# EAGLE board hip4081-hbridge2 (EAGLE 5.06)
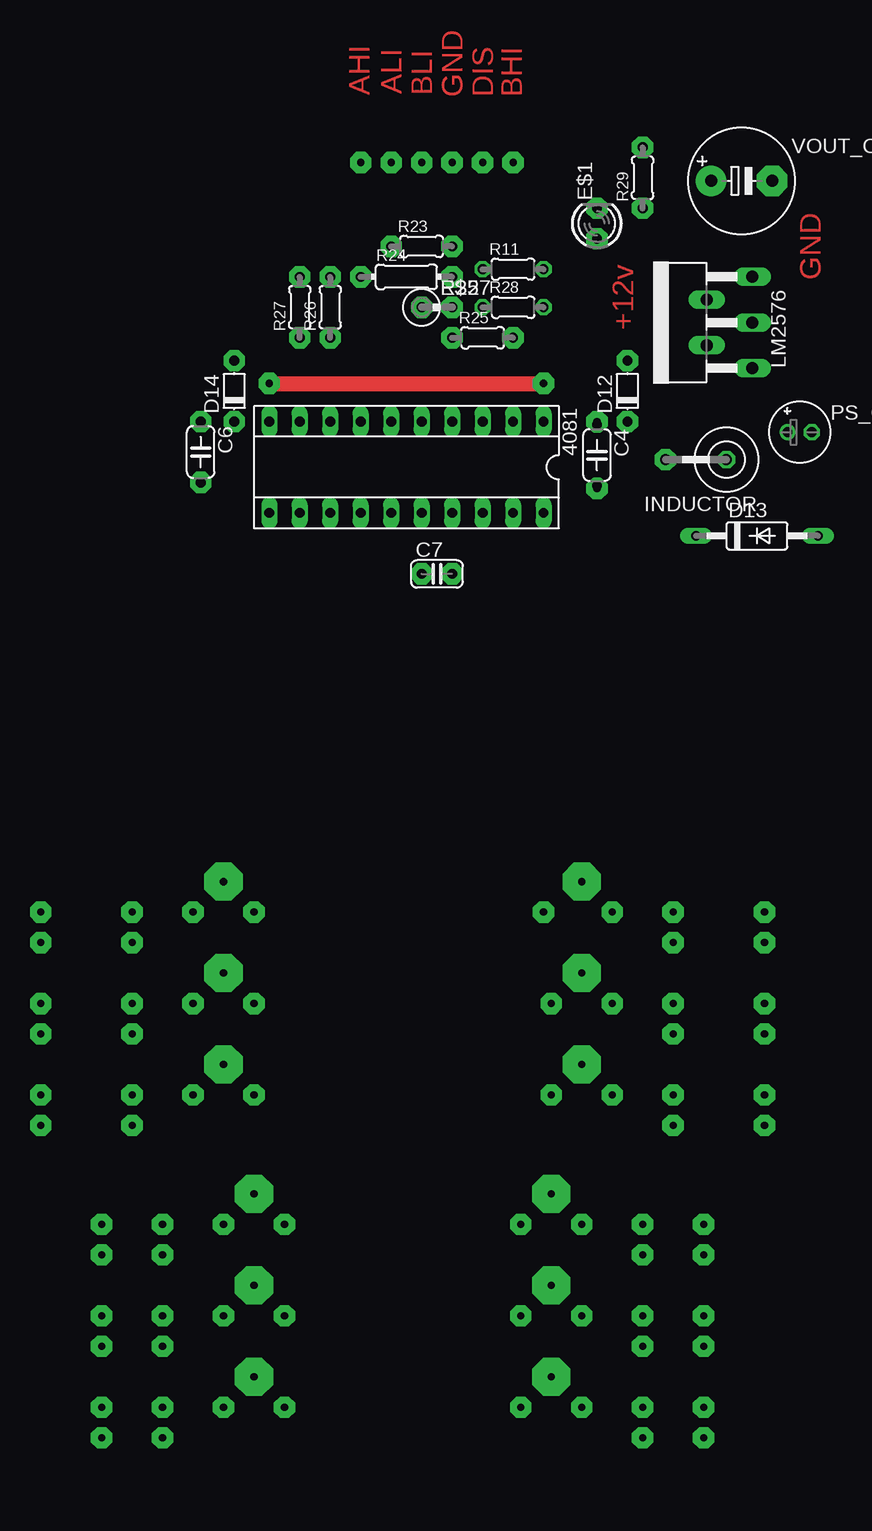
[diagram p0: board, top side]
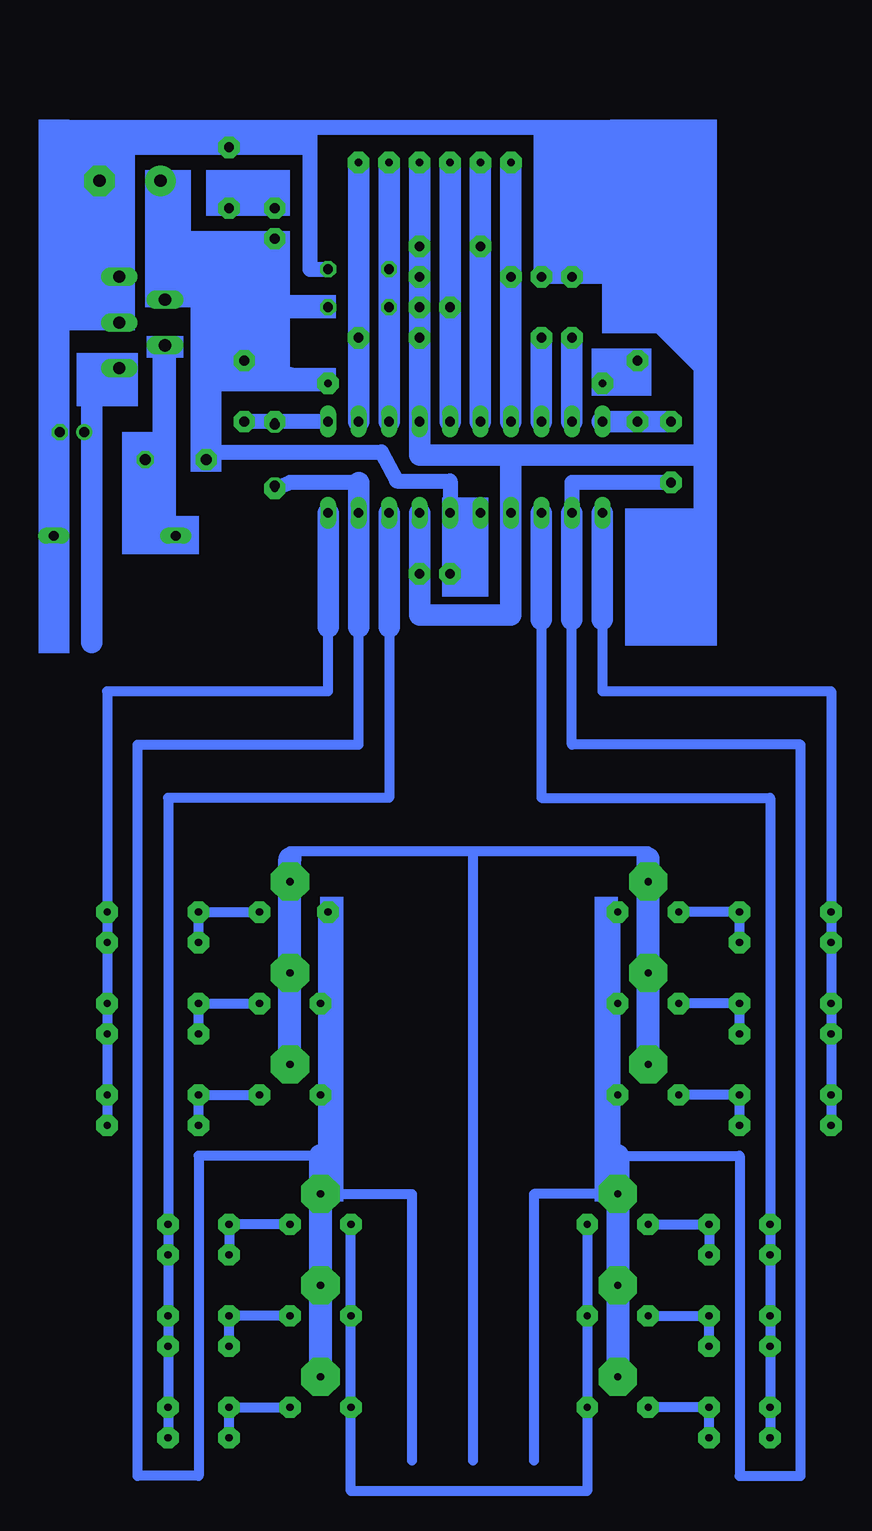
[diagram p1: board, bottom side, seen from below]

No outline drawn. Coordinates in mm, seen from the top.
Copper layers (1*16): Top 0.035mm / dielectric 1.5mm / Bottom 0.035mm
Design rules "default": minimum track width 10mil, minimum drill 24mil, track to track 8mil, track to pad 8mil, pad to pad 8mil, via to via 8mil, smd to smd 8mil, copper to edge 40mil, drill to drill 8mil, minimum pad ring 10mil, minimum via ring 8mil, stop-mask expansion 4mil, vias tented up to drill 0mil, thermal gap 10mil

## Footprints (pad centres in the part's own frame; a part is rotated, then mirrored left to right if it is on the bottom)
SOCKET-20 = drill 0.813 long: 1 -11.43,-3.81; 2 -8.89,-3.81; 3 -6.35,-3.81; 4 -3.81,-3.81; 5 -1.27,-3.81; 6 1.27,-3.81; 7 3.81,-3.81; 8 6.35,-3.81; 9 8.89,-3.81; 10 11.43,-3.81; 11 11.43,3.81; 12 8.89,3.81; 13 6.35,3.81; 14 3.81,3.81; 15 1.27,3.81; 16 -1.27,3.81; 17 -3.81,3.81; 18 -6.35,3.81; 19 -8.89,3.81; 20 -11.43,3.81
C050-024X044 = drill 0.813 octagon: 1 -2.54,0; 2 2.54,0
C025-024X044 = drill 0.813 octagon: 1 -1.27,0; 2 1.27,0
D-5 = drill 0.813 octagon: A 2.54,0; C -2.54,0
C2992 = drill 0.813 long: A 5.08,0; C -5.08,0
LED3MM = drill 0.813 octagon: A -1.27,0; K 1.27,0
0309V = drill 0.813 octagon: 1 -1.27,0; 2 1.27,0
LBC-SE = drill 0.914 octagon: 1 -2.54,0; 2 2.54,0
CB360 = drill 1.016 long: 1 -3.81,-8.255; 2 -1.905,-4.445; 3 0,-8.255; 4 1.905,-4.445; 5 3.81,-8.255
E2-5 = drill 0.813 pad 1.27 round: + -1.016,0 | drill 0.813 pad 1.27 octagon: - 1.016,0
0204/5 = drill 0.813 octagon: 1 -2.54,0; 2 2.54,0
0204/7 = drill 0.813 octagon: 1 -3.81,0; 2 3.81,0
E5-8,5 = drill 1.016 pad 2.54 round: + -2.54,0 | drill 1.016 pad 2.54 octagon: - 2.54,0

## Placement (x,y rotation side)
4081  [SOCKET-20]  28.57,22.48 180 top
C4  [C050-024X044]  44.45,23.5 270 top
C6  [C050-024X044]  11.43,23.75 270 top
C7  .47uf  [C025-024X044]  31.11,13.59 0 top
D12  [D-5]  46.99,28.83 90 top
D13  [C2992]  57.78,16.76 0 top
D14  [D-5]  14.22,28.83 90 top
E$1  [LED3MM]  44.45,42.8 90 top
E$57  [0309V]  31.11,35.81 0 top
INDUCTOR  330uH  [LBC-SE]  52.7,23.11 180 top
LM2576  [CB360]  49.15,34.54 90 top
PS_CAP2  100uF  [E2-5]  61.34,25.4 0 top
R11  [0204/5]  37.47,38.99 0 top
R22  [0309V]  31.11,35.81 0 top
R23  [0204/5]  29.84,40.89 0 top
R24  [0204/7]  28.57,38.35 0 top
R25  [0204/5]  34.92,33.27 0 top
R26  [0204/5]  22.23,35.81 90 top
R27  [0204/5]  19.68,35.81 90 top
R28  [0204/5]  37.47,35.81 0 top
R29  [0204/5]  48.26,46.61 90 top
VOUT_CAP  1000uf  [E5-8,5]  56.52,46.35 0 top

## Library data of the parts
4081 = ic-package
C4 C6 C7 E$57 PS_CAP2 R11 R22-R29 VOUT_CAP = rcl
D12-D14 = diode
E$1 = led
INDUCTOR = inductors
LM2576 = linear

## Nets
GND2: 4081.4
R24: 4081.5
S$2: 4081.19
S$4: 4081.11
S$10: 4081.18
S$11: 4081.15 4081.16
S$19: 4081.12
S$30: 4081.14 4081.17
S$33: 4081.10
S$34: 4081.1
S$37: INDUCTOR.1
S$41: R11.2
S$43: R28.2
S$76: 4081.2
S$78: 4081.3
S$80: 4081.9
S$81: 4081.8
S$83: 4081.6
S$84: 4081.7

## Tracks (layer width: path | path; a pad name or v marks a point on that pad's centre or on a via)
GND2  (via drill 0.6 pad 1.78)
  Bottom 1.27: v22.23,38.35 v19.68,38.35 16.51,38.35 8.26,30.1 8.89,23.5
  Bottom 1.778: 8.89,23.5 32.38,23.5 4081.4 v32.38,33.27 v32.38,35.81 v32.38,38.35 v32.38,40.89
R24  (via drill 0.6 pad 1.78)
  Bottom 1.778: 4081.5 v29.84,35.81 v29.84,47.88
S$1
  Bottom 1.27: 63.5,50.8 16.51,50.8 16.51,38.1
S$2  (via drill 0.6 pad 1.78)
  Bottom 1.27: 4081.19 37.47,21.21 43.18,21.21 v44.45,20.7
  Bottom 1.778: 37.47,21.21 37.47,9.14
S$4
  Bottom 1.778: 4081.11 17.14,9.78 | 22.23,18.67 22.23,9.78
S$5  (via drill 0.6 pad 3.17)
  other vias: 13.34,-12.06
S$6  (via drill 0.6 pad 1.78)
  Bottom 0.813: 17.14,9.53 17.14,3.81 -1.91,3.81 v-1.91,-14.61 v-1.91,-32.38
S$7  (via drill 0.6 pad 1.78, 0.6 pad 3.17)
  Bottom 0.406: v15.88,-14.61 15.88,-34.92
  Bottom 0.813: 15.88,-34.92 5.71,-34.92 5.71,-61.59 0.64,-61.59 0.64,-0.64 19.68,-0.64 19.68,9.53 | 15.88,-38.1 22.86,-38.1 22.86,-60.33
  Bottom 1.93: 15.88,-34.92 15.88,-38.1 v15.88,-53.34
S$8  (via drill 0.6 pad 3.17)
  other vias: 13.34,-19.68
S$9  (via drill 0.6 pad 1.78)
  other vias: 15.88,-22.23
S$10
  Bottom 0.813: 58.42,3.81 40.01,3.81 40.01,9.53
  Bottom 1.778: 4081.18 34.92,9.14 | 40.01,18.67 40.01,9.53 40.01,9.14
S$11  (via drill 0.6 pad 1.78)
  Top 1.27: v17.14,29.46 v40.01,29.46
  Bottom 1.016: 4081.16 4081.15 | 53.34,37.08 50.16,37.08 50.16,29.46 | 50.16,29.46 50.16,23.75 | v46.99,31.37 50.16,29.46 | v46.99,31.37 49.53,29.46 | v40.01,29.46 v46.99,31.37
  Bottom 1.27: 27.3,12.32 4081.15 4081.16 | 4081.16 v29.84,13.59 | 4081.16 29.84,21.34 34.29,21.34 35.56,23.75 50.16,23.75 | v17.14,29.46 17.14,31.37 v14.22,31.37 14.1,31.37
S$12  (via drill 0.6 pad 1.78)
  Bottom 0.813: 22.23,9.53 22.23,-5.08 3.17,-5.08 v3.17,-40.64 v3.17,-43.18 v3.17,-50.8 v3.17,-55.88 v3.17,-58.42
S$14  (via drill 0.6 pad 1.78)
  other vias: 15.88,-29.84
S$15  (via drill 0.6 pad 1.78)
  Bottom 0.813: v13.34,-40.64 v8.26,-40.64
S$16  (via drill 0.6 pad 3.17)
  other vias: 15.88,-38.1
S$18  (via drill 0.6 pad 3.17)
  other vias: 43.18,-12.06
S$19  (via drill 0.6 pad 1.78)
  Bottom 1.27: 4081.12 19.68,21.21 v11.43,21.21
  Bottom 1.778: 4081.12 19.68,9.78
S$20  (via drill 0.6 pad 3.17)
  other vias: 15.88,-45.72
S$21  (via drill 0.6 pad 1.78)
  other vias: 18.41,-48.26
S$22  (via drill 0.6 pad 1.78)
  Bottom 0.406: v18.41,-40.64 18.41,-60.33 | v38.1,-40.64 38.1,-60.33
  Bottom 0.813: v18.41,-40.64 18.41,-62.87 38.1,-62.87 v38.1,-40.64
S$24  (via drill 0.6 pad 1.78)
  other vias: 18.41,-55.88
S$25  (via drill 0.6 pad 3.17)
  Bottom 0.813: 43.18,-9.53 27.94,-9.53 | 27.94,-9.53 13.34,-9.53 13.34,-10.16 | 27.94,-9.53 27.94,-60.33
  Bottom 1.93: v13.34,-27.3 13.34,-10.16
S$27  (via drill 0.6 pad 3.17)
  other vias: 43.18,-19.68
S$30  (via drill 0.6 pad 1.78)
  Bottom 0.813: 8.26,23.11 24.77,23.11
  Bottom 1.27: 8.26,23.11 8.26,16.76
  Bottom 1.778: 24.77,23.11 4081.14 24.77,10.16 32.38,10.16 v32.38,13.59 4081.17
S$31  (via drill 0.6 pad 1.78)
  other vias: 40.64,-22.23
S$33  (via drill 0.6 pad 1.78)
  Bottom 1.778: v11.43,26.29 v14.22,26.29 4081.10
S$34  (via drill 0.6 pad 1.78)
  Bottom 1.27: 4081.1 v44.45,26.29 | 45.09,26.29 v44.45,26.29 | v44.45,26.29 43.81,26.29 | v44.45,26.29 v46.99,26.29
S$36  (via drill 0.6 pad 1.78)
  other vias: 40.64,-29.84
S$37
  Bottom 1.016: INDUCTOR.1 53.98,23.11 53.98,32
S$39  (via drill 0.6 pad 1.78)
  other vias: 50.16,23.11
S$41
  Bottom 1.27: R11.2 41.53,38.99 41.53,50.29
S$42
  Bottom 1.016: 56.52,30.73 59.69,30.73
  Bottom 1.778: 59.69,30.73 59.69,7.87
S$43
  Bottom 1.27: 40.26,35.81 R28.2 43.43,35.81
S$44  (via drill 0.6 pad 1.78)
  Bottom 1.778: v32.38,47.88 32.38,41.53
S$45
  Bottom 1.016: 56.52,34.54 63.5,34.54
S$46  (via drill 0.6 pad 1.78)
  other vias: 44.45,41.53
S$47  (via drill 0.6 pad 1.78)
  other vias: 44.45,44.07
S$48  (via drill 0.6 pad 1.78)
  other vias: 48.26,44.07
S$49  (via drill 0.6 pad 1.78)
  other vias: 48.26,49.15
S$50  (via drill 0.6 pad 3.17)
  other vias: 40.64,-38.1
S$53  (via drill 0.6 pad 3.17)
  other vias: 40.64,-45.72
S$54  (via drill 0.6 pad 1.78)
  other vias: 38.1,-48.26
S$56  (via drill 0.6 pad 1.78)
  other vias: 38.1,-55.88
S$57  (via drill 0.6 pad 1.78)
  other vias: 53.34,-48.26
S$58  (via drill 0.6 pad 1.78)
  Bottom 0.813: v43.18,-55.88 v48.26,-55.88 v48.26,-58.42
S$59  (via drill 0.6 pad 1.78)
  Bottom 0.813: v43.18,-48.26 v48.26,-48.26 v48.26,-50.8
S$60  (via drill 0.6 pad 1.78)
  other vias: 3.17,-48.26
S$61  (via drill 0.6 pad 1.78)
  other vias: 50.8,-14.61
S$62  (via drill 0.6 pad 1.78)
  other vias: 50.8,-22.23
S$64  (via drill 0.6 pad 1.78)
  other vias: 50.8,-29.84
S$68  (via drill 0.6 pad 1.78)
  other vias: 58.42,-29.84
S$69  (via drill 0.6 pad 1.78)
  Bottom 0.813: v13.34,-55.88 v8.26,-55.88 v8.26,-58.42
S$70  (via drill 0.6 pad 1.78)
  Bottom 0.813: v13.34,-48.26 v8.26,-48.26 v8.26,-50.8
S$71  (via drill 0.6 pad 1.78)
  other vias: 58.42,-22.23
S$72  (via drill 0.6 pad 1.78)
  other vias: 58.42,-17.14
S$76  (via drill 0.6 pad 1.78)
  Bottom 1.778: 4081.2 v37.47,33.27 v37.47,47.88
S$77  (via drill 0.6 pad 1.78)
  other vias: 5.71,-14.61
S$78  (via drill 0.6 pad 1.78)
  Bottom 1.778: v34.92,47.88 4081.3
S$79  (via drill 0.6 pad 1.78)
  other vias: 5.71,-22.23
S$80  (via drill 0.6 pad 1.78)
  Bottom 1.778: v19.68,33.27 4081.9
S$81  (via drill 0.6 pad 1.78)
  Bottom 1.778: v22.23,33.27 4081.8
S$82  (via drill 0.6 pad 1.78)
  other vias: 5.71,-29.84
S$83  (via drill 0.6 pad 1.78)
  Bottom 1.778: 4081.6 v27.3,40.89 v27.3,47.88
S$84  (via drill 0.6 pad 1.78)
  Bottom 1.778: 4081.7 v24.77,38.35 v24.77,47.88
S$85  (via drill 0.6 pad 1.78)
  other vias: -1.91,-29.84
S$86  (via drill 0.6 pad 1.78)
  other vias: -1.91,-22.23
S$87  (via drill 0.6 pad 1.78)
  Bottom 0.813: v50.8,-17.14 50.8,-14.61 v45.72,-14.61
S$88  (via drill 0.6 pad 1.78)
  other vias: -1.91,-17.14
S$89  (via drill 0.6 pad 1.78)
  Bottom 0.813: v5.71,-17.14 5.71,-14.61 v10.79,-14.61
S$90  (via drill 0.6 pad 1.78)
  Bottom 0.813: v5.71,-24.77 5.71,-22.23 v10.79,-22.23
S$91  (via drill 0.6 pad 1.78)
  other vias: -1.91,-24.77
S$92  (via drill 0.6 pad 1.78)
  Bottom 0.813: v5.71,-32.38 5.71,-29.84 v10.79,-29.84
S$93  (via drill 0.6 pad 1.78)
  Bottom 0.813: v50.8,-24.77 50.8,-22.23 v45.72,-22.23
S$94  (via drill 0.6 pad 1.78)
  other vias: 58.42,-24.77
S$99  (via drill 0.6 pad 1.78)
  Bottom 0.813: v50.8,-32.38 50.8,-29.84 v45.72,-29.84
S$103  (via drill 0.6 pad 1.78)
  Bottom 0.813: 8.26,-40.64 v8.26,-43.18
S$104  (via drill 0.6 pad 1.78)
  Bottom 0.813: v48.26,-43.18 v48.26,-40.64 v43.18,-40.64
S$105  (via drill 0.6 pad 3.17)
  Bottom 1.93: v43.18,-27.3 43.18,-10.16
S$106  (via drill 0.6 pad 3.17)
  Bottom 0.406: 40.64,-14.61 40.64,-34.92
  Bottom 0.813: 40.64,-34.92 50.8,-34.92 50.8,-61.59 55.88,-61.59 55.88,-0.64 37.47,-0.64 37.47,8.89 | 40.64,-38.1 33.02,-38.1 33.02,-60.33
  Bottom 1.93: 40.64,-34.92 40.64,-38.1 v40.64,-53.34
S$107  (via drill 0.6 pad 1.78)
  Bottom 0.813: 58.42,3.81 v58.42,-14.61 v58.42,-32.38
S$108  (via drill 0.6 pad 1.78)
  Bottom 0.813: 34.92,9.53 34.92,-5.08 53.34,-5.08 v53.34,-40.64 v53.34,-43.18 v53.34,-50.8 v53.34,-55.88 v53.34,-58.42
S$110  (via drill 0.6 pad 1.78)
  other vias: 40.01,-14.61
(copper drawn outside any net)
  shapes: Bottom area x36

## Text on the board
Top: GND | AHI | DIS | BHI | BLI | ALI | GND | +12v